# Altium PCB PCB1.PcbDoc
Units mil, origin at the board's own origin, x right, y up, seen from the top; angles counter-clockwise.
Board outline 6000 x 4000 mil, 2 copper layers (Top Layer, Bottom Layer); 94 components, 51 nets, 394 pads, 0 vias.
Unrouted connection lines stored in the file: 178.
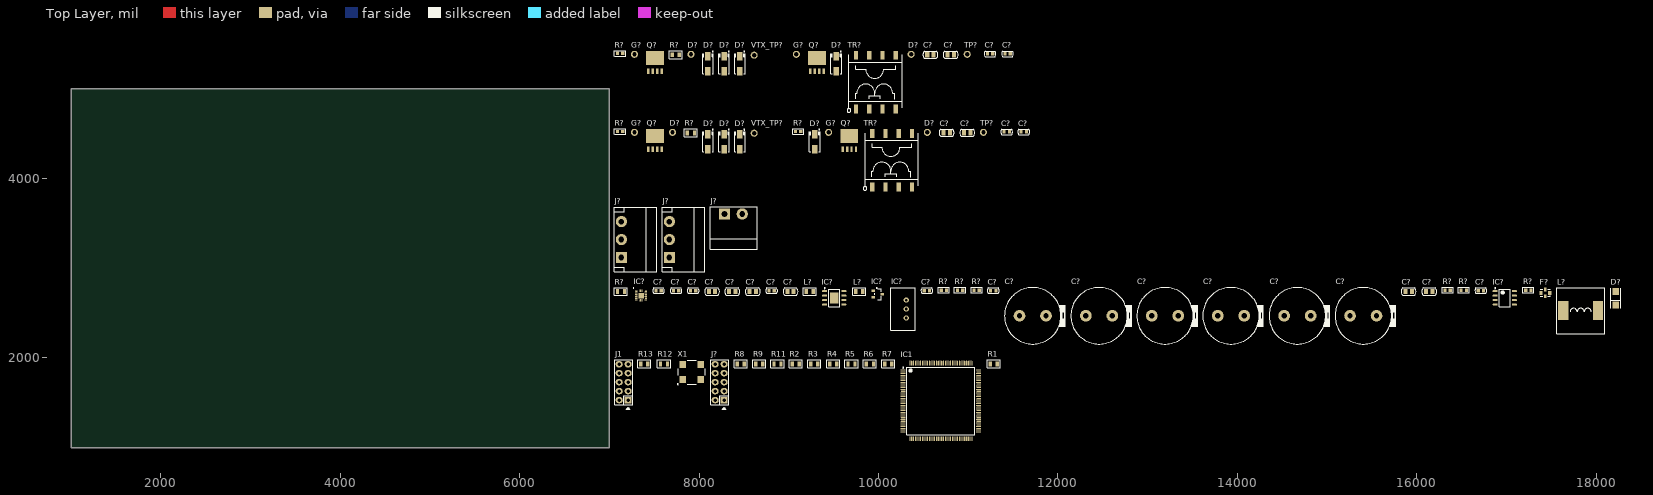
[diagram p0: Top Layer view]
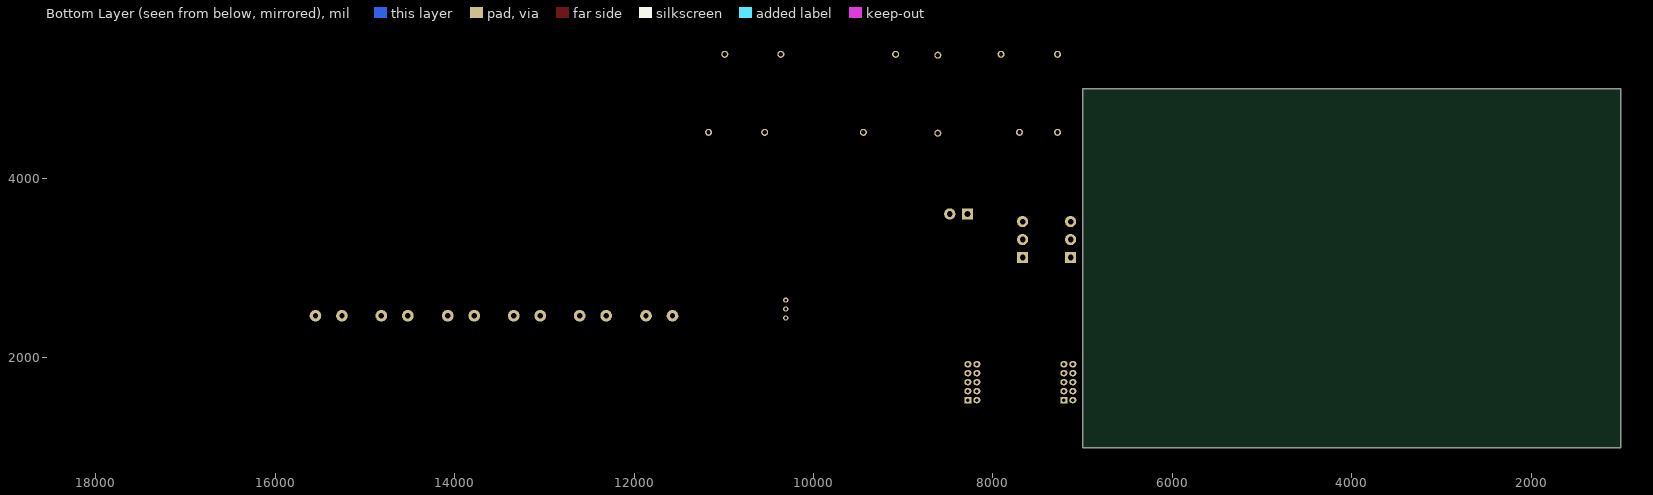
[diagram p1: Bottom Layer view, seen from below]

## Layer stack, top to bottom
Top Solder: solder mask 0.4, Solder Resist, Dk 3.5
Top Layer: signal copper 1.4
Dielectric 1: dielectric 12.6, FR-4, Dk 4.8
Bottom Layer: signal copper 1.4
Bottom Solder: solder mask 0.4, Solder Resist, Dk 3.5

## Board outline
1000,1000 7000,1000 7000,5000 1000,5000

## Design rules (kind name [scope] priority, off if disabled: settings)
Clearance [All] p1: gap=10 ignorepadtopadclearanceinfootprint=FALSE except(0: Arc-Hole Track-Hole SMDPad-Hole THPad-Hole Via-Hole Fill-Hole Poly-Hole Region-Hole Text-Hole)
PolygonConnect [All] p1: connectstyle=Relief reliefconductorwidth=10 reliefentries=4 polygonreliefangle="90 Angle" airgapwidth=10
RoomDefinition "TRANSMIT CH 2" [InComponentClass('TRANSMIT CH 2')] p1: confinementstyle=ConfineIn formatcopy=TRUE lockcomponents=FALSE outline 7045,2145 18295,2145 18295,5535 7045,5535
RoomDefinition "TRANSMIT CH 1" [InComponentClass('TRANSMIT CH 1')] p2: confinementstyle=ConfineIn formatcopy=TRUE lockcomponents=FALSE outline 7045,2145 18295,2145 18295,5535 7045,5535
RoomDefinition Sender_Top [InComponentClass('Sender_Top')] p3: confinementstyle=ConfineIn formatcopy=TRUE lockcomponents=FALSE outline 7045,1420 8660,1420 8660,3795 7045,3795
RoomDefinition "POWER CIRCUIT" [InComponentClass('POWER CIRCUIT')] p4: confinementstyle=ConfineIn formatcopy=TRUE lockcomponents=FALSE outline 7045,2145 18295,2145 18295,5535 7045,5535
RoutingVias [All] p1: holewidth=28 width=50 viastyle="Through Hole" minholewidth=28 minwidth=50 maxholewidth=28 maxwidth=50
SolderMaskExpansion [All] p1: expansion=4 istentingtop=FALSE
Width [All] p1: maxlimit=10 minlimit=10 preferedwidth=10
30 further rules are at their usual default settings.

## Classes and differential pairs
net class "RS232 Debug": NetC?_1 NetC?_2 NetIC?_8 NetIC?_13 RS232V+ RS232V- RXD_Debug TXD_Debug
component class "TRANSMIT CH 2": C? D? G? Q? R? TP? TR? VTX_TP?
component class "TRANSMIT CH 1": C? D? G? Q? R? TP? TR? VTX_TP?
component class Sender_Top: J?
component class "POWER CIRCUIT": C? D? F? IC? L? LD? R?
component class Fpga: C1 C2 C3 C4 C5 C6 C7 C8 C9 C10 C11 C13 C14 C15 C16 C17 C18 C19 C21 C22 C24 C? IC1 IC? J1 J? LD1 LD2 R1 R2 R3 R4 R5 R6 R7 R8 R9 R11 R12 R13 X1

## Components (designator, comment, footprint, x,y, rotation, side; value= is the part's Value field where it differs from the comment)
C? "C-0805" C-0805 10990,4510 r0 top
C? "C-0805" C-0805 10760,4510 r0 top
C? "1uF 0805 20V" C-0603 11620,4520 r0 top
C? "0.1uF 0805 20V" C-0603 11430,4520 r0 top
C? "1uF 0805 20V" C-0603 11440,5390 r0 top
C? "C-0805" C-0805 10580,5380 r0 top
C? "0.1uF 0805 20V" C-0603 11245,5390 r0 top
C? "C-0805" C-0805 10805,5380 r0 top
C? "35V2200u" CAP_16X25 13930,2470 r0 top
C? "35V2200u" CAP_16X25 14670,2470 r0 top
C? "100nF 20V" C-0603 11280,2750 r0 top
C? "47uF 50V" C-0603 8810,2750 r0 top
C? "100nF" C-0603 7745,2750 r0 top
C? "100uF 50V" C-0805 15910,2740 r0 top
C? "10uF 50V" C-0603 16715,2750 r0 top
C? "10uF 50V" C-0603 10540,2750 r0 top
C? "10uF 50V" C-0805 16140,2740 r0 top
C? "35V2200u" CAP_16X25 15405,2470 r0 top
C? "35V2200u" CAP_16X25 12460,2470 r0 top
C? "C-0805_100nF" C-0805 8600,2740 r0 top
C? "C-0805_10uF" C-0805 8145,2740 r0 top
C? "100nF 20V" C-0805 9020,2740 r0 top
C? "47uF 16V" C-0603 7935,2750 r0 top
C? "35V2200u" CAP_16X25 13195,2470 r0 top
C? "C-0805_10uF" C-0805 8370,2740 r0 top
C? "10uF" C-0603 7550,2750 r0 top
C? "35V2200u" CAP_16X25 11720,2470 r0 top
D? "ES1D" SMA 8280,4410 r90 top
D? "ES1D" SMA 8100,4410 r90 top
D? "ES1D" SMA 8455,4410 r90 top
D? "ES1D" SMA 9290,4410 r90 top
D? "Test_Point" Test_Point 10545,4515 r0 top
D? "Test_Point" Test_Point 7705,4515 r0 top
D? "ES1D" SMA 8280,5280 r90 top
D? "Test_Point" Test_Point 7910,5385 r0 top
D? "Test_Point" Test_Point 10365,5385 r0 top
D? "ES1D" SMA 8100,5280 r90 top
D? "ES1D" SMA 9530,5280 r90 top
D? "ES1D" SMA 8455,5280 r90 top
D? "DIODE SCHOTTKY 40V 1A DO214AC" DFN380P520X45-2N 18220,2740 r90 top
F? "SBSPP0500683MX" Filter_SBSPP0500 17385,2725 r0 top
G? "Test_Point" Test_Point 9445,4515 r0 top
G? "Test_Point" Test_Point 7280,4515 r0 top
G? "Test_Point" Test_Point 9085,5385 r0 top
G? "Test_Point" Test_Point 7280,5385 r0 top
IC1 "10M08SAE144" SQFP50P2200X2200X200-144N 10275,1865 r0 top
IC? "AP2210N-3.3" SOT23-3 9940,2750 r0 top
IC? "EP5388QI" PQFN50P320X320X100_HS-17N 7355,2695 r0 top
IC? "VX78012-500" VREG 10310,2445 r90 top
IC? "LM5002" SOIC127P600X205-8N 16875,2745 r0 top
IC? "BD70GA5WEFJ-E2" HTSOP-J8 9400,2745 r0 top
J1 "CON-2x5" PIN-2X5-2.54-1.0 7210,1530 r90 top
J? "CON-2x5" PIN-2X5-2.54-1.0 8280,1530 r90 top
J? "CONN 3x1" WAGO-3_pins 7670,3320 r90 top
J? "CONN 3x1" WAGO-3_pins 7135,3320 r90 top
J? "24V IN" WAGO_2_pins 8285,3605 r0 top
L? "1uH 0805" 0805 9785,2740 r0 top
L? "330UH 1.15A" IND 17635,2530 r0 top
L? "1uH 0805" 0805 9235,2740 r0 top
Q? "BUK7Y9R9" BUK7Y9R) 7435,4325 r0 top
Q? "BUK7Y9R9" BUK7Y9R) 9600,4325 r0 top
Q? "BUK7Y9R9" BUK7Y9R) 9240,5195 r0 top
Q? "BUK7Y9R9" BUK7Y9R) 7435,5195 r0 top
R1 "10k  0805 1%" RES-0805 11285,1935 r0 top
R2 "1k  0805 1%" RES-0805 9080,1935 r0 top
R3 "1k  0805 1%" RES-0805 9285,1935 r0 top
R4 "1k  0805 1%" RES-0805 9495,1935 r0 top
R5 "1k  0805 1%" RES-0805 9700,1935 r0 top
R6 "1k  0805 1%" RES-0805 9905,1935 r0 top
R7 "1k  0805 1%" RES-0805 10110,1935 r0 top
R8 "xx  0805" RES-0805 8465,1935 r0 top
R9 "xx  0805" RES-0805 8670,1935 r0 top
R11 "1k  0805 1%" RES-0805 8875,1935 r0 top
R12 "1k  0805 1%" RES-0805 7610,1935 r0 top
R13 "10k  0805 1%" RES-0805 7390,1935 r0 top
R? "0R NM" RES-0805 7910,4510 r0 top
R? "0.5R" R-0603 7120,4525 r0 top
R? "0.5R" R-0603 9105,4525 r0 top
R? "0.5R" R-0603 7120,5395 r0 top
R? "0R NM" RES-0805 7740,5380 r0 top
R? "52.3k  0805" R-0603 10910,2755 r0 top
R? "54.9k  0805" R-0603 17245,2755 r0 top
R? "1k  0805 1%" RES-0805 7130,2740 r0 top
R? "6k04" R-0603 10730,2755 r0 top
R? "1.47k  0805" R-0603 11095,2755 r0 top
R? "60k4" R-0603 16525,2755 r0 top
R? "73.2k  0805" R-0603 16345,2755 r0 top
TP? "GND" Test_Point 11170,4515 r0 top
TP? "GND" Test_Point 10990,5385 r0 top
TR? "10:10:150" Trafo_15x15 9930,3905 r0 top
TR? "10:10:150" Trafo_15x15 9750,4775 r0 top
VTX_TP? "Test_Point" Test_Point 8615,4505 r90 top
VTX_TP? "Test_Point" Test_Point 8615,5375 r90 top
X1 "CB3LV-3C-50M0000" OSC 7820,1760 r0 top

## Footprints (in the part's own frame and the unit in brackets; to place one, negate y for a bottom-side part, rotate by r counter-clockwise, add the part's x,y. Pads: shape width x height; smd on the part's side, far side on the other; paste and mask are expansions set on the pad)
0805 [mm] "SMD, 0805"
  rect 0.95x1.4 smd: 1(-1,0) 2(1,0)
  silkscreen extent -1.85,-1.08 1.85,1.08, body extent -1,-0.62 1,0.63, height 0.45
BUK7Y9R) [mm] "MOS FET"
  rect 0.7x1.524 smd: 1(3.81,0) 3(0,0) 3(1.27,0) 3(2.54,0)
  rect 5x4 smd: 2(1.9,3.81)
C-0603 [mm] "Capacitors 0603"
  rect 0.9x0.95 smd: 1(-0.75,0) 2(0.75,0)
  silkscreen extent -1.68,-0.78 1.66,0.77, body extent -0.8,-0.4 0.8,0.4, height 0.86
C-0805 [mm] "0805"
  rect 1.15x1.45 smd: 1(-0.9,0) 2(0.9,0)
  silkscreen extent -2.12,-1.02 2.12,1.02, body extent -1,-0.63 1,0.63, height 0.78
CAP_16X25 [mil] "Polar Capacitors"
  round 130 hole 59.06: 1(-147.64,0) 2(147.64,0)
  silkscreen extent -315,-315 362,315, body extent -315,-315 313,315, height 985
DFN380P520X45-2N [mm] "DFN, 2-Leads, Body 2.50x5.20mm, Pitch 3.80mm, IPC Medium Density"
  rect 2x1.9 smd: 1(0,0) 2(-3.8,0)
  silkscreen extent -4.75,-1.45 0.95,1.45, body extent -4.75,-1.45 0.95,1.45, height 0.45
Filter_SBSPP0500 [mm]
  rect 0.9x1.2 smd: 1(0,0) 3(2.5,0)
  rect 0.8x1 smd: 2(1.245,-0.991) 2(1.245,0.965)
  silkscreen extent -0.13,-1.02 2.67,1.02
HTSOP-J8 [mm] "TSOP, 8-Leads, Body 4.90x3.90mm, Pitch 1.27mm, IPC Medium Density"
  rect 2.4x3.2 smd: 0(2.718,-1.956)
  oval 1.45x0.6 smd: 1(0,0) 2(0,-1.27) 3(0,-2.54) 4(0,-3.81) 5(5.45,-3.81) 6(5.45,-2.54) 7(5.45,-1.27) 8(5.45,0)
  silkscreen extent -0.12,-4.41 4.33,0.97, body extent 0.72,-4.41 4.72,0.6, height 1.1
IND [mm]
  rect 2.9x5.4 smd: 1(0,0) 2(9.8,0)
  silkscreen extent -1.9,-6.6 11.7,6.4
OSC [mm]
  rect 1.8x2 smd: 1(0,0) 2(5.08,0) 3(5.1,4.2) 4(0,4.2)
  silkscreen extent -1.54,-1.44 6.4,5.5, body extent -0.9,-0.4 6.1,4.6, height 1.7
PIN-2X5-2.54-1.0 [mil] "Pin Header"
  rect 70x80 hole 39.37: 1(0,0)
  oval 70x80 hole 39.37: 2(0,100) 3(100,0) 4(100,100) 5(200,0) 6(200,100) 7(300,0) 8(300,100) 9(400,0) 10(400,100)
  silkscreen extent -100,-50 450,150, body extent -50,-50 450,150, height 398
PQFN50P320X320X100_HS-17N [mm] "PQFN, 16-Leads, Body 3.20x3.20mm, Pitch 0.50mm, Thermal Pad 1.60x1.60mm, IPC Medium Density"
  oval 0.7x0.35 smd: 1(-1.35,1.25) 2(-1.35,0.75) 3(-1.35,0.25) 4(-1.35,-0.25) 5(-1.35,-0.75) 6(-1.35,-1.25) 9(1.35,-1.25) 10(1.35,-0.75) 11(1.35,-0.25) 12(1.35,0.25) 13(1.35,0.75) 14(1.35,1.25)
  oval 0.35x0.7 smd: 7(-0.25,-1.35) 8(0.25,-1.35) 15(0.25,1.35) 16(-0.25,1.35)
  rect 1.6x1.6 smd: ""(0,0)
  silkscreen extent -2.27,2.03 -2.02,2.27, body extent -1.7,-1.7 1.7,1.7, height 1
R-0603 [mm] "Resistor  0603"
  rect 0.9x0.95 smd: 1(-0.75,0) 2(0.75,0)
  silkscreen extent -1.58,-0.79 1.57,0.77, body extent -0.8,-0.4 0.8,0.4, height 0.86
RES-0805 [mm] "SMD, 0805"
  rect 0.95x1.4 smd: 1(-1,0) 2(1,0)
  silkscreen extent -1.85,-1.08 1.85,1.08, body extent -1,-0.62 1,0.63, height 0.45
SMA [mm] "DO-214AC"
  rect 2.35x1.55 smd: 1(-2.15,0) 2(2.15,0)
  silkscreen extent -2.8,-1.5 3.58,1.5, body extent -2.6,-1.3 2.6,1.3, height 2.64
SOIC127P600X205-8N [mm] "SOIC, 8-Leads, Body 4.90x3.90mm, Pitch 1.27mm, IPC Medium Density"
  oval 1.45x0.6 smd: 1(0,0) 2(0,-1.27) 3(0,-2.54) 4(0,-3.81) 5(5.45,-3.81) 6(5.45,-2.54) 7(5.45,-1.27) 8(5.45,0)
  silkscreen extent -0.12,-4.41 4.33,0.97, body extent 0.72,-4.41 4.72,0.6, height 2.05
SOT23-3 [mm] "SOT23, 3-Leads, Body 2.90x2.55mm, Pitch 0.95mm, IPC Medium Density"
  rect 1x0.7 smd: 1(0,0) 2(0,-1.9) 3(2.6,-0.95)
  silkscreen extent 0.51,-2.54 2.29,0.89, body extent 0.5,-2.57 2.3,0.53, height 1.45
SQFP50P2200X2200X200-144N [mm] "SQFP, 144-Leads, Body 20.00x20.00mm, Pitch 0.50mm, IPC Medium Density"
  oval 1.4x0.3 smd: 1(0,0) 2(0,-0.5) 3(0,-1) 4(0,-1.5) 5(0,-2) 6(0,-2.5) 7(0,-3) 8(0,-3.5) 9(0,-4) 10(0,-4.5) 11(0,-5) 12(0,-5.5) 13(0,-6) 14(0,-6.5) 15(0,-7) 16(0,-7.5) 17(0,-8) 18(0,-8.5) 19(0,-9) 20(0,-9.5) 21(0,-10) 22(0,-10.5) 23(0,-11) 24(0,-11.5) 25(0,-12) 26(0,-12.5) 27(0,-13) 28(0,-13.5) 29(0,-14) 30(0,-14.5) 31(0,-15) 32(0,-15.5) 33(0,-16) 34(0,-16.5) 35(0,-17) 36(0,-17.5) 73(21.4,-17.5) 74(21.4,-17) 75(21.4,-16.5) 76(21.4,-16) 77(21.4,-15.5) 78(21.4,-15) 79(21.4,-14.5) 80(21.4,-14) 81(21.4,-13.5) 82(21.4,-13) 83(21.4,-12.5) 84(21.4,-12) 85(21.4,-11.5) 86(21.4,-11) 87(21.4,-10.5) 88(21.4,-10) 89(21.4,-9.5) 90(21.4,-9) 91(21.4,-8.5) 92(21.4,-8) 93(21.4,-7.5) 94(21.4,-7) 95(21.4,-6.5) 96(21.4,-6) 97(21.4,-5.5) 98(21.4,-5) 99(21.4,-4.5) 100(21.4,-4) 101(21.4,-3.5) 102(21.4,-3) 103(21.4,-2.5) 104(21.4,-2) 105(21.4,-1.5) 106(21.4,-1) 107(21.4,-0.5) 108(21.4,0)
  oval 0.3x1.4 smd: 37(1.95,-19.45) 38(2.45,-19.45) 39(2.95,-19.45) 40(3.45,-19.45) 41(3.95,-19.45) 42(4.45,-19.45) 43(4.95,-19.45) 44(5.45,-19.45) 45(5.95,-19.45) 46(6.45,-19.45) 47(6.95,-19.45) 48(7.45,-19.45) 49(7.95,-19.45) 50(8.45,-19.45) 51(8.95,-19.45) 52(9.45,-19.45) 53(9.95,-19.45) 54(10.45,-19.45) 55(10.95,-19.45) 56(11.45,-19.45) 57(11.95,-19.45) 58(12.45,-19.45) 59(12.95,-19.45) 60(13.45,-19.45) 61(13.95,-19.45) 62(14.45,-19.45) 63(14.95,-19.45) 64(15.45,-19.45) 65(15.95,-19.45) 66(16.45,-19.45) 67(16.95,-19.45) 68(17.45,-19.45) 69(17.95,-19.45) 70(18.45,-19.45) 71(18.95,-19.45) 72(19.45,-19.45) 109(19.45,1.95) 110(18.95,1.95) 111(18.45,1.95) 112(17.95,1.95) 113(17.45,1.95) 114(16.95,1.95) 115(16.45,1.95) 116(15.95,1.95) 117(15.45,1.95) 118(14.95,1.95) 119(14.45,1.95) 120(13.95,1.95) 121(13.45,1.95) 122(12.95,1.95) 123(12.45,1.95) 124(11.95,1.95) 125(11.45,1.95) 126(10.95,1.95) 127(10.45,1.95) 128(9.95,1.95) 129(9.45,1.95) 130(8.95,1.95) 131(8.45,1.95) 132(7.95,1.95) 133(7.45,1.95) 134(6.95,1.95) 135(6.45,1.95) 136(5.95,1.95) 137(5.45,1.95) 138(4.95,1.95) 139(4.45,1.95) 140(3.95,1.95) 141(3.45,1.95) 142(2.95,1.95) 143(2.45,1.95) 144(1.95,1.95)
  silkscreen extent -0.12,-18.35 20.3,0.85, body extent -0.32,-19.79 21.68,2.21, height 1.63
Test_Point [mm]
  round 2 hole 1.2: 1(0,0)
Trafo_15x15 [mm]
  rect 1.2x2.5 smd: 1(0,0) 2(3.75,0) 3(7.5,0) 4(11.25,0) 5(11.25,15.2) 6(7.5,15.2) 7(3.75,15.2) 8(0,15.2)
  silkscreen extent -2.53,-0.93 13.1,15.3
VREG [mm]
  round 1.5 hole 0.75: 1(0,0) 2(2.54,0) 3(5.08,0)
  silkscreen extent -3.4,-2.6 8.6,4.4
WAGO-3_pins [mm] "3 pin connector"
  rect 3.2x3.2 hole 1.6: 1(-5.08,0)
  round 3.2 hole 1.6: 2(0,0) 3(5.08,0)
  silkscreen extent -9.18,-10 9.18,2, body extent -9.1,-10 9.1,2, height 8.4
WAGO_2_pins [mm]
  rect 3.2x3.2 hole 1.6: 1(0,0)
  round 3.2 hole 1.6: 2(5,0)
  silkscreen extent -4.08,-10 9.2,2

## Part data
C? C? C? C? C? C? C?: Manufacturer 1=Yageo, Manufacturer Part Number 1=CC1206KKX7RBBB332, Operating Temperature="-55°C ~ 125°C", Package / Case="1206 (3216 Metric)", Ratings=-, Supplier Part Number 1=311-1506-1-ND, Temperature Coefficient=X7R, Tolerance=±10%, Voltage - Rated=500V, Applications="General Purpose", Category 1=Capacitors, ComponentLink1Description=http://www.yageo.com/documents/recent/UPY-NP0X7R_MV_100-to-630V_21.pdf, ComponentLink1URL=http://www.yageo.com/documents/recent/UPY-NP0X7R_MV_100-to-630V_21.pdf, Description 1="CAP CER 3300PF 500V X7R 1206", Failure Rate=-, Features=-, Height - Seated (Max)=-, Lead Spacing=-, Lead Style=-, Mounting Type="Surface Mount, MLCC", Notification="Current market demand for these product types have resulted in fluctuating and extending lead times. Lead times may differ.", Packaging="Cut Tape (CT)", Part Status=Active, Pricing 1="1=0.31, 10=0.214, 100=0.1085, 500=0.07424, 1000=0.06568 (USD)", RoHS 1="RoHS Compliant", Size / Dimension="0.126\" L x 0.063\" W (3.20mm x 1.60mm)", Stock 1=4928, Supplier 1=Digi-Key, Thickness (Max)="0.057\" (1.45mm)"
C? C? C? C?: library part 0805CAPxxrrrrv, "CAP CER rrrrUF xV x% type 0805"
C? C? C? C? C? C?: library part CAP_2200uF_35V, "Capacitor", Capacitance=2200µF, ESR (Equivalent Series Resistance)=-, Lifetime @ Temp.="2000 Hrs @ 105°C", Manufacturer=Kemet, Manufacturer Part Number=ESH228M035AM7AA, Operating Temperature="-40°C ~ 105°C", Package / Case="Radial, Can", Supplier Part Number 1=399-6572-ND, Tolerance=±20%, Voltage Rating=35V, Applications="General Purpose", Category=Capacitors, ComponentLink1Description=http://www.kemet.com/docfinder?Partnumber=ESH228M035AM7AA, ComponentLink1URL=http://www.kemet.com/docfinder?Partnumber=ESH228M035AM7AA, Height - Seated (Max)="1.063\" (27.00mm)", Impedance=-, Lead Spacing="0.295\" (7.50mm)", Mounting Type="Through Hole", Packaging=Bulk, Pricing 1="1=0.98, 10=0.77, 50=0.6676, 100=0.5778, 250=0.5136, 500=0.43656, 1000=0.3852, 2500=0.35952, 5000=0.34668 (USD)", Ripple Current=-, RoHS="RoHS Compliant", Size / Dimension="0.630\" Dia (16.00mm)", Stock 1=1972, Supplier 1=Digi-Key, Surface Mount Land Size=-, Type=-
C? C? C?: library part C-0805_100nF, Manufacturer 1=Yageo, Manufacturer Part Number 1=CC1206KKX7RBBB332, Operating Temperature="-55°C ~ 125°C", Package / Case="1206 (3216 Metric)", Ratings=-, Supplier Part Number 1=311-1506-1-ND, Temperature Coefficient=X7R, Tolerance=±10%, Voltage - Rated=500V, Applications="General Purpose", Category 1=Capacitors, ComponentLink1Description=http://www.yageo.com/documents/recent/UPY-NP0X7R_MV_100-to-630V_21.pdf, ComponentLink1URL=http://www.yageo.com/documents/recent/UPY-NP0X7R_MV_100-to-630V_21.pdf, Description 1="CAP CER 3300PF 500V X7R 1206", Failure Rate=-, Features=-, Height - Seated (Max)=-, Lead Spacing=-, Lead Style=-, Mounting Type="Surface Mount, MLCC", Notification="Current market demand for these product types have resulted in fluctuating and extending lead times. Lead times may differ.", Packaging="Cut Tape (CT)", Part Status=Active, Pricing 1="1=0.31, 10=0.214, 100=0.1085, 500=0.07424, 1000=0.06568 (USD)", RoHS 1="RoHS Compliant", Size / Dimension="0.126\" L x 0.063\" W (3.20mm x 1.60mm)", Stock 1=4928, Supplier 1=Digi-Key, Thickness (Max)="0.057\" (1.45mm)"
C? C? C? C? C? C?: library part C-0805_10uF, Manufacturer 1=Yageo, Manufacturer Part Number 1=CC1206KKX7RBBB332, Operating Temperature="-55°C ~ 125°C", Package / Case="1206 (3216 Metric)", Ratings=-, Supplier Part Number 1=311-1506-1-ND, Temperature Coefficient=X7R, Tolerance=±10%, Voltage - Rated=500V, Applications="General Purpose", Category 1=Capacitors, ComponentLink1Description=http://www.yageo.com/documents/recent/UPY-NP0X7R_MV_100-to-630V_21.pdf, ComponentLink1URL=http://www.yageo.com/documents/recent/UPY-NP0X7R_MV_100-to-630V_21.pdf, Description 1="CAP CER 3300PF 500V X7R 1206", Failure Rate=-, Features=-, Height - Seated (Max)=-, Lead Spacing=-, Lead Style=-, Mounting Type="Surface Mount, MLCC", Notification="Current market demand for these product types have resulted in fluctuating and extending lead times. Lead times may differ.", Packaging="Cut Tape (CT)", Part Status=Active, Pricing 1="1=0.31, 10=0.214, 100=0.1085, 500=0.07424, 1000=0.06568 (USD)", RoHS 1="RoHS Compliant", Size / Dimension="0.126\" L x 0.063\" W (3.20mm x 1.60mm)", Stock 1=4928, Supplier 1=Digi-Key, Thickness (Max)="0.057\" (1.45mm)"
C?: library part C-0805_3_3uF, Manufacturer 1=Yageo, Manufacturer Part Number 1=CC1206KKX7RBBB332, Operating Temperature="-55°C ~ 125°C", Package / Case="1206 (3216 Metric)", Ratings=-, Supplier Part Number 1=311-1506-1-ND, Temperature Coefficient=X7R, Tolerance=±10%, Voltage - Rated=500V, Applications="General Purpose", Category 1=Capacitors, ComponentLink1Description=http://www.yageo.com/documents/recent/UPY-NP0X7R_MV_100-to-630V_21.pdf, ComponentLink1URL=http://www.yageo.com/documents/recent/UPY-NP0X7R_MV_100-to-630V_21.pdf, Description 1="CAP CER 3300PF 500V X7R 1206", Failure Rate=-, Features=-, Height - Seated (Max)=-, Lead Spacing=-, Lead Style=-, Mounting Type="Surface Mount, MLCC", Notification="Current market demand for these product types have resulted in fluctuating and extending lead times. Lead times may differ.", Packaging="Cut Tape (CT)", Part Status=Active, Pricing 1="1=0.31, 10=0.214, 100=0.1085, 500=0.07424, 1000=0.06568 (USD)", RoHS 1="RoHS Compliant", Size / Dimension="0.126\" L x 0.063\" W (3.20mm x 1.60mm)", Stock 1=4928, Supplier 1=Digi-Key, Thickness (Max)="0.057\" (1.45mm)"
D? D? D? D? D? D? D? D?: library part ES1x, "Diode", Capacitance @ Vr, F="7pF @ 4V, 1MHz", Current - Average Rectified (Io)=1A, Current - Reverse Leakage @ Vr="5μA @ 200V", Manufacturer="Fairchild/ON Semiconductor", Operating Temperature - Junction="-55°C ~ 150°C", Package / Case="DO-214AC, SMA", Supplier Device Package="SMA (DO-214AC)", Supplier Part Number 1=ES1DFSTR-ND, Voltage - DC Reverse (Vr) (Max)=200V, Voltage - Forward (Vf) (Max) @ If="920mV @ 1A", Category="Discrete Semiconductor Products", ComponentLink1Description=https://www.fairchildsemi.com/datasheets/ES/ES1A.pdf, ComponentLink1URL=https://www.fairchildsemi.com/datasheets/ES/ES1A.pdf, Diode Type=Standard, Manufacturer Part Number=ES1D, Mounting Type="Surface Mount", Packaging="Tape & Reel (TR)", Part Status=Active, Pricing 1="7500=0.0567, 15000=0.0504, 37500=0.04725, 52500=0.0419, 187500=0.04032 (USD)", Reverse Recovery Time (trr)=15ns, RoHS="RoHS Compliant", Speed="Fast Recovery =< 500ns, > 200mA (Io)", Stock 1=135000, Supplier 1=Digi-Key
D?: Base Part Number=CDBA140, Capacitance @ Vr, F=-, Current - Average Rectified (Io)=1A, Manufacturer 1="Comchip Technology", Manufacturer Part Number 1=CDBA140-G, Operating Temperature - Junction="-65°C ~ 125°C", Package / Case="DO-214AC, SMA", Supplier Device Package="DO-214AC (SMA)", Supplier Part Number 1=641-1015-1-ND, Category 1="Discrete Semiconductor Products", ComponentLink1Description=http://www.comchiptech.com/admin/files/product/CDBA140-HF%20Thru192841.%20CDBA1100-HF%20RevB.pdf, ComponentLink1URL=http://www.comchiptech.com/admin/files/product/CDBA140-HF%20Thru192841.%20CDBA1100-HF%20RevB.pdf, Description 1="DIODE SCHOTTKY 40V 1A DO214AC", Diode Type=Schottky, Mounting Type="Surface Mount", Packaging="Cut Tape (CT)", Part Status=Active, Pricing 1="1=0.37, 10=0.338, 100=0.1893, 500=0.1014, 1000=0.06895 (USD)", RoHS 1="RoHS Compliant", Speed="Fast Recovery =< 500ns, > 200mA (Io)", Stock 1=527910, Supplier 1=Digi-Key
F?: library part Filter_SBSPP0500683MX
IC1: Manufacturer=Intel, Manufacturer Part Number=10M08SAE144C8G, Supplier Part Number 1=544-3132-ND, Supplier 1=Digi-Key
IC?: "AP2210N-3.3TRG1DICT-ND"
IC?: Manufacturer=Intel, Supplier Part Number 1=544-2875-6-ND, Manufacturer Part Number=EP5388QI, Supplier 1=Digi-Key
IC? IC?: Current - Output="400mA (Switch)", Frequency - Switching="50kHz ~ 1.5MHz", Manufacturer 1="Texas Instruments", Manufacturer Part Number 1=LM5002SD/NOPB, Operating Temperature="-40°C ~ 125°C (TJ)", Package / Case="8-WDFN Exposed Pad", Supplier Device Package="8-WSON (4x4)", Supplier Part Number 1=LM5002SD/NOPBTR-ND, Voltage - Input (Max)=75V, Voltage - Input (Min)=3.1V, Voltage - Output (Max)="76V (Switch)", Category 1="Integrated Circuits (ICs)", ComponentLink1Description=http://www.ti.com/lit/ds/symlink/lm5002.pdf, ComponentLink1URL=http://www.ti.com/lit/ds/symlink/lm5002.pdf, Description 1="IC REG MULT CONFIG ISO ADJ 8WSON", Function="Step-Up, Step-Up/Step-Down", Mounting Type="Surface Mount", Number of Outputs=1, Output Configuration="Positive, Isolation Capable", Output Type=Adjustable, Packaging="Tape & Reel (TR)", Part Status=Active, Pricing 1="1000=1.9656, 2000=1.86732, 5000=1.79712 (USD)", RoHS 1="RoHS Compliant", Stock 1=3000, Supplier 1=Digi-Key, Synchronous Rectifier=No, Topology="Boost, Flyback, Forward Converter, SEPIC", Voltage - Output (Min/Fixed)=3.1V
  IC?: Base Part Number=LM5002
J1 J?: library part CONN-2x5, Manufacturer="Harwin Inc.", Manufacturer Part Number=M20-9970546
J? J?: library part "3x1 connector"
J?: library part "2x1 connector"
L? L?: library part induktor_0806, Inductance=330, Inductor Construction=Shielded, Manufacturer 1=BOURNS, Manufacturer Part Number 1=SRR1260-331K, Power Inductor Case="12.5mm x 12.5mm x 6", RMS Current (Irms)=1.15, Saturation Current (Isat)=1.1, Supplier Part Number 1=2458509, ComponentLink1Description=http://www.farnell.com/datasheets/2251090.pdf, ComponentLink1URL=http://www.farnell.com/datasheets/2251090.pdf, Description 1="BOURNS - SRR1260-331K - INDUCTOR, SHIELDED, 330UH, 1.1A, SMD", Pricing 1="1=0.843, 10=0.721, 25=0.661, 50=0.6, 100=0.552 (GBP)", Product Range="SRR1260 Series", Q Factor=22, RoHS 1=YES, Stock 1=143, Supplier 1=Farnell
L?: library part "FIXED IND 330UH 1.15A 580 MOHM", Inductance=330, Inductor Construction=Shielded, Manufacturer 1=BOURNS, Manufacturer Part Number 1=SRR1260-331K, Power Inductor Case="12.5mm x 12.5mm x 6", RMS Current (Irms)=1.15, Saturation Current (Isat)=1.1, Supplier Part Number 1=2458509, ComponentLink1Description=http://www.farnell.com/datasheets/2251090.pdf, ComponentLink1URL=http://www.farnell.com/datasheets/2251090.pdf, Description 1="BOURNS - SRR1260-331K - INDUCTOR, SHIELDED, 330UH, 1.1A, SMD", Pricing 1="1=0.843, 10=0.721, 25=0.661, 50=0.6, 100=0.552 (GBP)", Product Range="SRR1260 Series", Q Factor=22, RoHS 1=YES, Stock 1=143, Supplier 1=Farnell
R1 R13: library part CRCW080510K0FKEA, "RES 10 KOHM 1/8W 1% 0805 SMD", Case Code - in=0805, Case Code - mm=2012, Manufacturer 1="Vishay Dale", Manufacturer 2=Vishay, Manufacturer Part Number 2=CRCW080510K0FKEAHP, Operating Temperature="-55°C ~ 155°C", Operating Temperature Range="- 55 C to + 155 C", Package / Case="0805 (2012 Metric)", Package/Case="0805 (2012 metric)", Power (Watts)="0.125W, 1/8W", Power Rating="330 mW", Resistance="10 kOhms", Resistance (Ohms)=10k, Supplier Part Number 1=541-10.0KCCT-ND, Temperature Coefficient=±100ppm/°C, Tolerance=±1%, Voltage Rating="150 V", Brand="Vishay / Dale", Category 1=Resistors, Category 2="Thick Film Resistors - SMD", ComponentLink1Description=http://www.vishay.com/docs/20035/dcrcwe3.pdf, ComponentLink1URL=http://www.vishay.com/docs/20035/dcrcwe3.pdf, ComponentLink2Description=http://www.mouser.com/ds/2/427/crcwhpe3-46056.pdf, ComponentLink2URL=http://www.mouser.com/ds/2/427/crcwhpe3-46056.pdf, Composition="Thick Film", Description 1="RES SMD 10K OHM 1% 1/8W 0805", Description 2="Thick Film Resistors - SMD 1/3watt 10Kohms 1% 100ppm High Power", Diameter=-, Features="Automotive AEC-Q200", Height="0.020\" (0.50mm)", Length="2 mm", Manufacturer Part Number 1=CRCW080510K0FKEA, Minimum Order Quantity=1, Packaging="Cut Tape (CT)", Product="Thick Film Resistors SMD", Product Category="0805 Thick Film Chip Resistors", Reeling=True, RoHS 1="RoHS Compliant", RoHS 2="RoHS Compliant By Exemption", RoHS - Mouser=E, Series="CRCW-HP e3", Size / Dimension="0.079\" L x 0.049\" W (2.00mm x 1.25mm)", Standard Pack Qty=5000, Supplier 1=Digi-Key, Supplier 2=Mouser, Supplier Device Package="0805 (2012 Metric)", Supplier Part Number 2=71-CRCW080510K0FKEAH, Termination Style=SMD/SMT, Type="Pulse Proof, High Power Thick Film Chip Resistors", Width="1.2 mm"
R2 R3 R4 R5 R6 R7 R11 R12 R? R? R?: library part CRCW08051K00FKEA, "RES 1 KOHM 1/8W 1% 0805 SMD", Case Code - in=0805, Case Code - mm=2012, Manufacturer 1="Vishay Dale", Manufacturer 2=Vishay, Operating Temperature="-55°C ~ 155°C", Operating Temperature Range="- 55 C to + 155 C", Package / Case="0805 (2012 Metric)", Package/Case="0805 (2012 metric)", Power (Watts)="0.125W, 1/8W", Power Rating="125 mW (1/8 W)", Resistance="1 kOhms", Resistance (Ohms)=1k, Supplier Part Number 1=541-1.00KCCT-ND, Temperature Coefficient=±100ppm/°C, Tolerance=±1%, Voltage Rating="150 V", Brand="Vishay / Dale", Category 1=Resistors, Category 2="Thick Film Resistors - SMD", ComponentLink1Description=http://www.vishay.com/docs/20035/dcrcwe3.pdf, ComponentLink1URL=http://www.vishay.com/docs/20035/dcrcwe3.pdf, ComponentLink2Description=http://www.mouser.com/ds/2/427/dcrcwe3-109170.pdf, ComponentLink2URL=http://www.mouser.com/ds/2/427/dcrcwe3-109170.pdf, Composition="Thick Film", Description 1="RES SMD 1K OHM 1% 1/8W 0805", Description 2="Thick Film Resistors - SMD 1/8watt 1Kohms 1% 100ppm", Features="Automotive AEC-Q200", Height="0.020\" (0.50mm)", Length="2 mm", Manufacturer Part Number 1=CRCW08051K00FKEA, Manufacturer Part Number 2=CRCW08051K00FKEA, Minimum Order Quantity=1, Packaging="Cut Tape (CT)", Product="Thick Film Resistors SMD", Product Category="0805 Thick Film Chip Resistors", Reeling=True, RoHS 1="RoHS Compliant", RoHS 2="RoHS Compliant By Exemption", RoHS - Mouser=E, Series=CRCW, Size / Dimension="0.079\" L x 0.049\" W (2.00mm x 1.25mm)", Standard Pack Qty=5000, Supplier 1=Digi-Key, Supplier 2=Mouser, Supplier Device Package="0805 (2012 Metric)", Supplier Part Number 2=71-CRCW0805-1.0K-E3, Termination Style=SMD/SMT, Width="1.25 mm"
R8 R9 R? R? R? R? R? R?: library part "CRCW0805xxxxJN Default", "RES xx OHM 1/8W 5% 0805 SMD", Category 1=Resistors
R? R? R?: library part RES-0805
TP? TP?: library part Test_Point
TR? TR?: library part TRAFO_15x15, Coil Forme=B66414B6008T001, Cover Plate=B66414A7000X000, link PDF=https://www.tdk-electronics.tdk.com/inf/80/db/fer/efd_15_8_5.pdf, Yoke=B66414B2000X000
X1: Manufacturer="CTS-Frequency Controls", Supplier Part Number 1=CTX283LVCT-ND, Manufacturer Part Number=CB3LV-3C-50M0000, Supplier 1=Digi-Key

## Nets (pads, with @x,y where several pads share a name; then routed paths per layer and width w, separated by ;. In a path a pad name is that pad's centre, name@x,y a point inside that pad or via, vN(x,y) a via of type N, cw(c..) or ccw(c..) an arc to the next point about the centre after c; other vN are vias at no path point)
3.3V: 
3V3_1: IC1.1 IC1.2 IC1.9 IC1.23 IC1.31 IC1.34 IC1.35 IC1.36 IC1.37 IC1.40 IC1.49 IC1.51 IC1.67 IC1.71 IC1.72 IC1.73 IC1.82 IC1.94 IC1.103 IC1.107 IC1.108 IC1.109 IC1.115 IC1.117 IC1.128 IC1.139 IC1.143 IC1.144 IC?.5@7301.85,2665.47 IC?.7@7345.16,2641.85 IC?.8@7364.84,2641.85 J1.4 R1.2 R2.1 R3.1 R4.1 R5.1 R6.1 R7.1 R11.2 R13.2 R?.1@7090.63,2740 X1.1 X1.4
+3V3: C?.1@8334.57,2740 C?.2@8635.43,2740 IC?.2@9940,2675.2
+5V: IC?.13 IC?.14
+6V5: C?.1@7520.47,2750 C?.1@8109.57,2740 C?.2@7774.53,2750 IC?.1@9400,2745 IC?.2@9400,2695
+12V: C?.2@9055.43,2740 C?.2@11274.53,5390 C?.2@11459.53,4520 C?.2@11469.53,5390 C?.2@11649.53,4520 IC?.3@10310,2645 L?.1@9195.63,2740
CTS1: J?.4 J?.6
DBR1: J?.2@8180,1530 J?.7
GND: C?.1@7715.47,2750 C?.1@7905.47,2750 C?.1@8564.57,2740 C?.1@8984.57,2740 C?.1@10544.57,5380 C?.1@10724.57,4510 C?.1@10769.57,5380 C?.1@11215.47,5390 C?.1@11250.47,2750 C?.1@11400.47,4520 C?.1@11410.47,5390 C?.1@11590.47,4520 C?.2@7579.53,2750 C?.2@8180.43,2740 C?.2@8405.43,2740 C?.2@8839.53,2750 C?.2@10569.53,2750 C?.2@11025.43,4510 C?.2@11867.64,2470 C?.2@12607.64,2470 C?.2@13342.64,2470 C?.2@14077.64,2470 C?.2@14817.64,2470 C?.2@15552.64,2470 C?.2@15945.43,2740 C?.2@16175.43,2740 F?.2 IC1.42 IC1.53 IC1.63 IC1.68 IC1.83 IC1.95 IC1.104 IC1.116 IC1.125 IC1.133 IC1.137 IC1.142 IC?.0 IC?.1@9940,2750 IC?.2@7301.85,2724.53 IC?.2@10310,2545 IC?.3@7301.85,2704.84 IC?.3@9400,2645 IC?.4@9400,2595 IC?.4@16875,2595 IC?.6@7301.85,2645.79 IC?.6@9614.57,2645 IC?.7@9614.57,2695 IC?.10 IC?.11 IC?.12 J1.2 J1.10 J?.2@8481.85,3605 J?.9 Q?.3 R8.1 R9.1 R12.2 R?.1@7700.63,5380 R?.1@7870.63,4510 R?.1@10700.47,2755 R?.1@10880.47,2755 R?.1@11065.47,2755 TP?.1 X1.2
GND_chasis2: C?.2@10795.43,4510
GND_chasis_1: C?.2@10615.43,5380 C?.2@10840.43,5380
NetC?_1: 
NetC?_2: C?.2@16744.53,2750 R?.1@16315.47,2755
NetD?_1: D?.1@10545,4515 Q?.2@9674.8,4475 TR?.1@9930,3905
NetF?_1: F?.1
NetG?_1: G?.1@9445,4515 Q?.1@9750,4325 R?.2@9134.53,4525
NetIC1_15: IC1.15 R1.1
NetIC1_16: IC1.16
NetIC1_18: IC1.18
NetIC1_19: IC1.19
NetIC1_20: IC1.20
NetIC1_75: IC1.75
NetIC1_126: IC1.126 R2.2
NetIC1_129: IC1.129 R5.2
NetIC1_132: IC1.132
NetIC1_134: IC1.134
NetIC1_136: IC1.136 R3.2
NetIC1_138: IC1.138 R4.2
NetIC?_5: IC?.5@17089.57,2595 R?.2@10939.53,2755
NetIC?_6: IC?.6@17089.57,2645 R?.1@17215.47,2755 R?.2@11124.53,2755 R?.2@16374.53,2755
NetIC?_8: 
NetIC?_13: 
NetLD1_A: R6.2
NetLD2_A: R7.2
NetLD?_A: R?.2@7169.37,2740
OSC1: IC1.27 X1.3
PPS_EXT1: IC1.84 R9.2
PPS_OCXO1: IC1.81 R8.2
R1IN: J?.5
RESET1: IC1.121 R11.1
RS232V+: IC?.3@10042.36,2712.6
RS232V-: C?.1@10954.57,4510
RXD_Debug: 
T1OUT: J?.3@8280,1630
TCK1: J1.1 R12.1
TDI1: J1.9
TDO1: J1.3
TMS1: J1.5 R13.1
TXD_Debug: 
VIN: C?.1@16104.57,2740 F?.3 IC?.2@16875,2695 L?.1@9745.63,2740 L?.1@17635,2530 R?.2@16554.53,2755
VTX: C?.1@11572.36,2470 C?.1@12312.36,2470 C?.1@13047.36,2470 C?.1@13782.36,2470 C?.1@14522.36,2470 C?.1@15257.36,2470 C?.1@15874.57,2740 D?.2@18220,2590.39 R?.2@17274.53,2755 TR?.2 TR?.3 VTX_TP?.1
pads on no net: C?.1@8780.47,2750 C?.1@10510.47,2750 C?.1@16685.47,2750 C?.2@7964.53,2750 C?.2@11309.53,2750 D?.1@7705,4515 D?.1@7910,5385 D?.1@8100,4325.35 D?.1@8100,5195.35 D?.1@8280,4325.35 D?.1@8280,5195.35 D?.1@8455,4325.35 D?.1@8455,5195.35 D?.1@9290,4325.35 D?.1@9530,5195.35 D?.1@10365,5385 D?.1@18220,2740 D?.2@8100,4494.65 D?.2@8100,5364.65 D?.2@8280,4494.65 D?.2@8280,5364.65 D?.2@8455,4494.65 D?.2@8455,5364.65 D?.2@9290,4494.65 D?.2@9530,5364.65 G?.1@7280,4515 G?.1@7280,5385 G?.1@9085,5385 IC1.3 IC1.4 IC1.5 IC1.6 IC1.7 IC1.8 IC1.10 IC1.11 IC1.12 IC1.13 IC1.14 IC1.17 IC1.21 IC1.22 IC1.24 IC1.25 IC1.26 IC1.28 IC1.29 IC1.30 IC1.32 IC1.33 IC1.38 IC1.39 IC1.41 IC1.43 IC1.44 IC1.45 IC1.46 IC1.47 IC1.48 IC1.50 IC1.52 IC1.54 IC1.55 IC1.56 IC1.57 IC1.58 IC1.59 IC1.60 IC1.61 IC1.62 IC1.64 IC1.65 IC1.66 IC1.69 IC1.70 IC1.74 IC1.76 IC1.77 IC1.78 IC1.79 IC1.80 IC1.85 IC1.86 IC1.87 IC1.88 IC1.89 IC1.90 IC1.91 IC1.92 IC1.93 IC1.96 IC1.97 IC1.98 IC1.99 IC1.100 IC1.101 IC1.102 IC1.105 IC1.106 IC1.110 IC1.111 IC1.112 IC1.113 IC1.114 IC1.118 IC1.119 IC1.120 IC1.122 IC1.123 IC1.124 IC1.127 IC1.130 IC1.131 IC1.135 IC1.140 IC1.141 IC?. IC?.1@7301.85,2744.21 IC?.1@10310,2445 IC?.1@16875,2745 IC?.3@16875,2645 IC?.4@7301.85,2685.16 IC?.5@9614.57,2595 IC?.7@17089.57,2695 IC?.8@9614.57,2745 IC?.8@17089.57,2745 IC?.9 IC?.15 IC?.16 J1.6 J1.7 J1.8 J?.1 J?.2@7135,3320 J?.2@7670,3320 J?.3@7135,3520 J?.3@7670,3520 J?.8 J?.10 L?.2 Q?.1@7585,4325 Q?.1@7585,5195 Q?.1@9390,5195 Q?.2@7509.8,4475 Q?.2@7509.8,5345 Q?.2@9314.8,5345 R?.1@7090.47,4525 R?.1@7090.47,5395 R?.1@9075.47,4525 R?.1@16495.47,2755 R?.2@7149.53,4525 R?.2@7149.53,5395 R?.2@7779.37,5380 R?.2@7949.37,4510 R?.2@10759.53,2755 TR?.1@9750,4775 TR?.4 TR?.5 TR?.6 TR?.7 TR?.8